# Altium PCB 矩形板V4.0.pcbdoc (part 1 of 2)
Units mm, origin at the board's own origin, x right, y up, seen from the top; angles counter-clockwise.
Board outline 153.79 x 190.97 mm, 2 copper layers (Top Layer, Bottom Layer); 164 components, 217 nets, 717 pads, 298 vias.
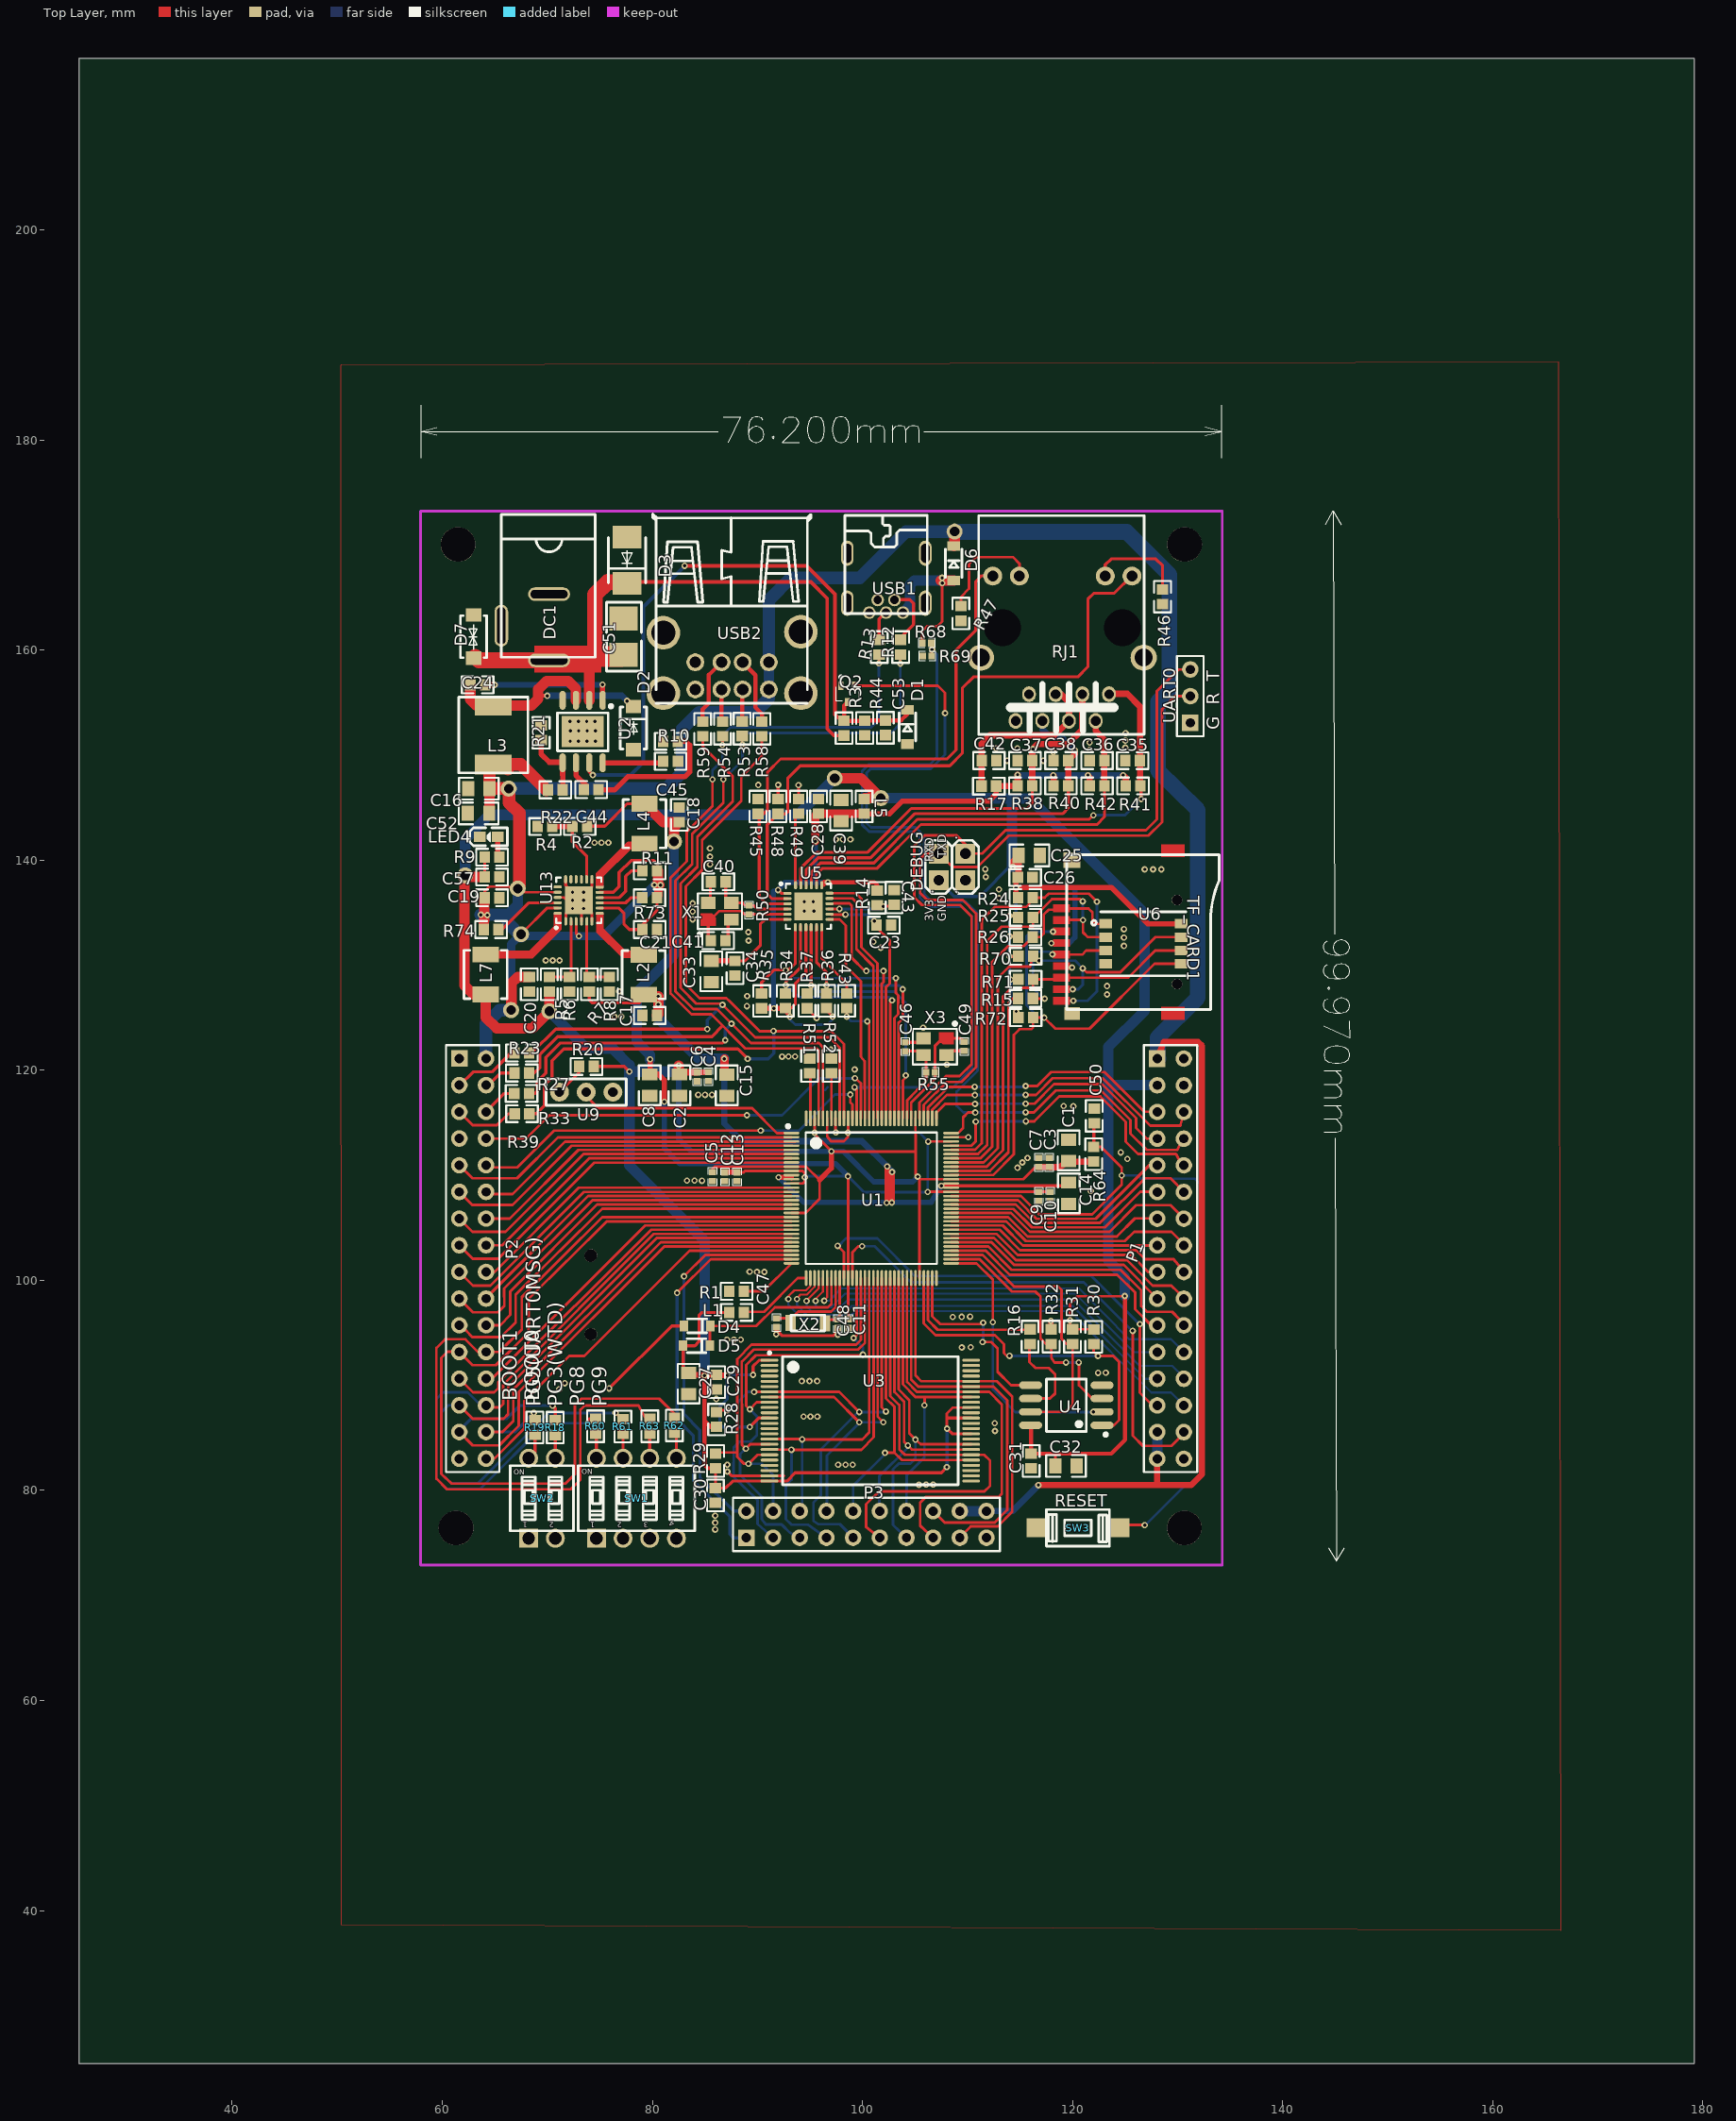
[diagram p0: Top Layer view]
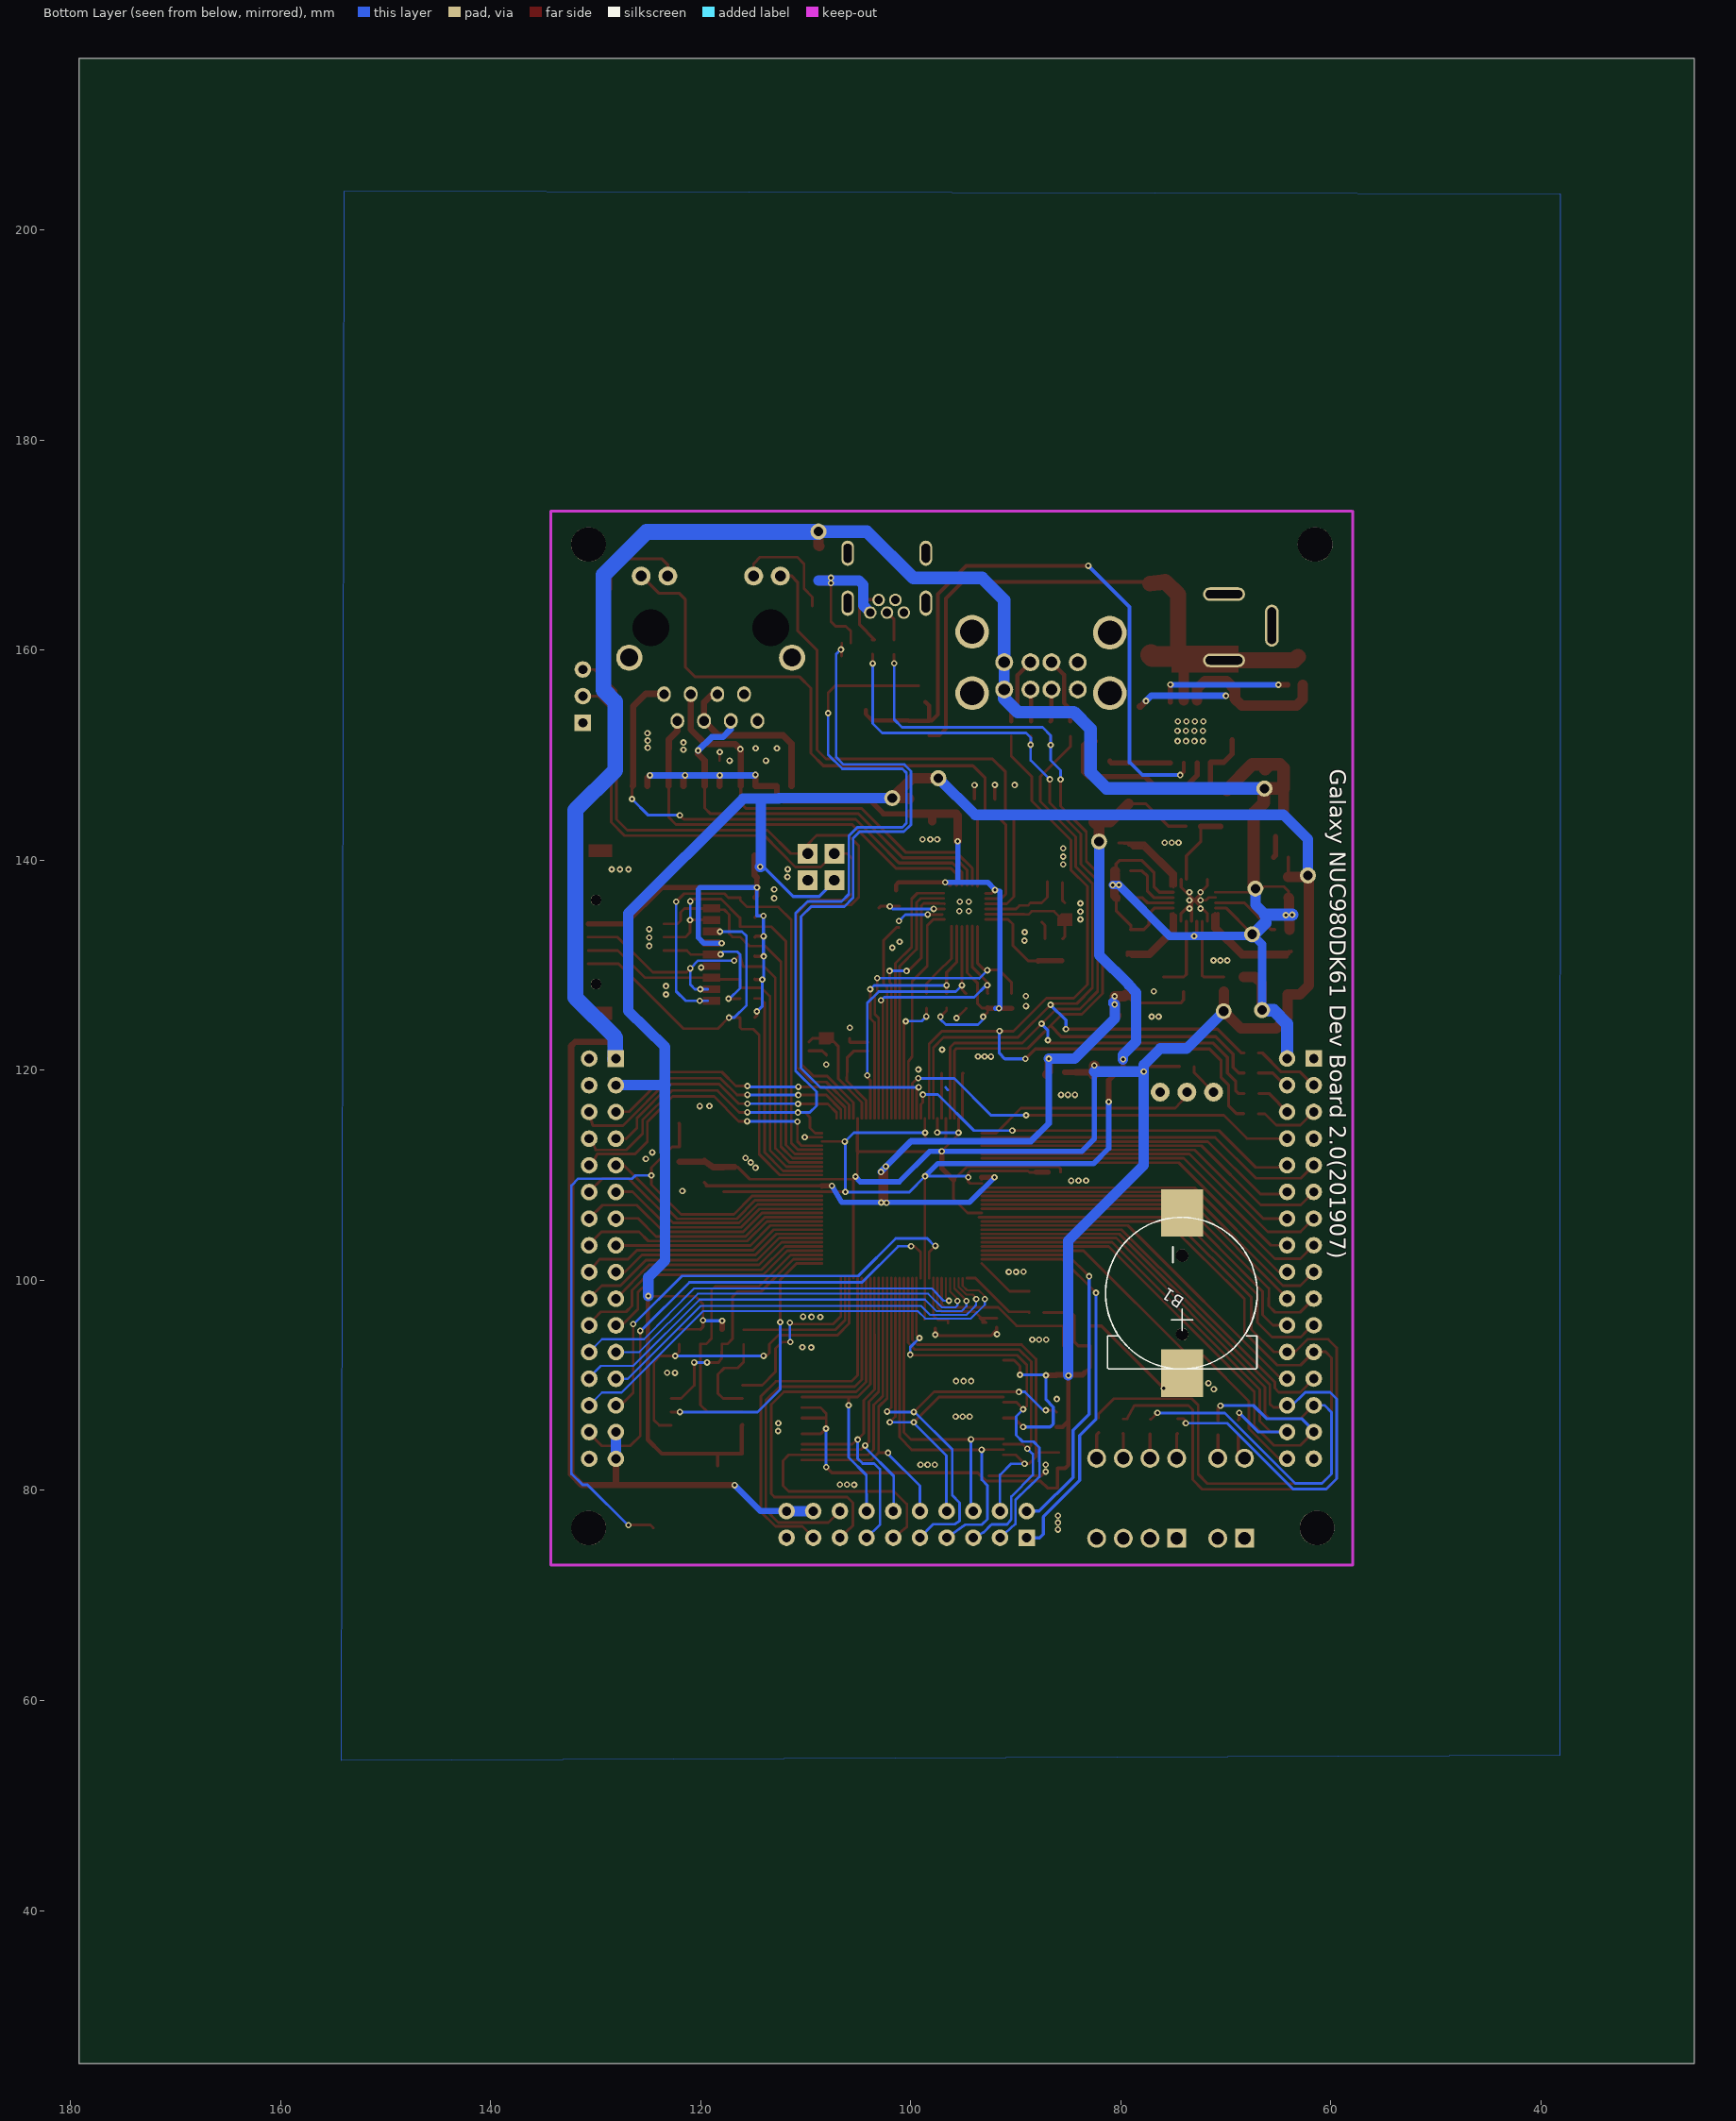
[diagram p1: Bottom Layer view, seen from below]

## Layer stack, top to bottom
Top Layer: signal copper (thickness not stored)
Dielectric: dielectric 0.32, FR-4, Dk 4.8
Bottom Layer: signal copper (thickness not stored)

## Board outline
179.187,25.4 25.4,25.4 25.4,216.368 179.187,216.368

## Components (designator, comment, footprint, x,y, rotation, side; value= is the part's Value field where it differs from the comment)
B1 "CR1220-2" BATTERY-2 74.141,98.779 r270 bottom
C1 "10uF" 0805 119.617,112.358 r270 top
C2 "10uF" 0805 82.583,118.59 r90 top
C3 "100nF" 0402 117.801,111.219 r270 top
C4 "100nF" 0402 85.341,119.399 r90 top
C5 "100nF" 0402 85.721,109.879 r90 top
C6 "100nF" 0402 84.261,119.379 r90 top
C7 "100nF" 0402 116.781,111.219 r270 top
C8 "10uF" 0805 79.751,118.589 r90 top
C9 "100nF" 0402 116.781,107.999 r90 top
C10 "100nF" 0402 117.861,107.999 r90 top
C11 "100nF" 0402 98.681,95.879 r90 top
C12 "100nF" 0402 86.901,109.859 r90 top
C13 "100nF" 0402 88.061,109.859 r90 top
C14 "10uF" 0805 119.641,108.299 r90 top
C15 "10uF" 0805 87.081,118.579 r90 top
C16 "22uF" 0805 63.477,146.819 r180 top
C17 "10uF" 0603 79.741,125.219 r0 top
C18 "22uF" 0603 82.563,144.317 r270 top
C19 "10uF" 0603 64.733,136.417 r180 top
C20 "10uF" 0603 68.286,128.179 r90 top
C21 "10uF" 0603 79.743,133.397 r180 top
C23 "15pF" 0603 102.041,133.819 r180 top
C24 "10nF" 0603 63.371,156.699 r0 top
C25 "10uF" 0805 115.875,140.459 r180 top
C26 "100nF" 0603 115.491,138.359 r180 top
C27 "10uF" 0805 83.444,90.173 r90 top
C28 "100nF" 0603 95.821,145.119 r270 top
C29 "100nF" 0603 86.111,90.3 r270 top
C30 "100nF" 0603 86.001,79.519 r90 top
C31 "100nF" 0603 116.061,82.799 r270 top
C32 "10uF" 0805 119.391,82.323 r0 top
C33 "10uF" 0805 85.617,129.408 r270 top
C34 "100nF" 0603 87.867,129.708 r270 top
C35 "10pF" 0603 125.722,149.475 r180 top
C36 "10pF" 0603 122.33,149.486 r180 top
C37 "10pF" 0603 115.472,149.486 r180 top
C38 "10pF" 0603 118.901,149.486 r180 top
C39 "10uF" 0805 97.961,144.719 r270 top
C40 "22pF" 0603 86.281,137.939 r180 top
C41 "22pF" 0603 86.261,132.339 r180 top
C42 "22nF" 0603 112.043,149.486 r0 top
C43 "100nF" 0603 103.018,136.446 r270 top
C44 "3.3nF" 0603 74.181,146.719 r180 top
C45 "100nF" 0603 81.741,149.419 r0 top
C46 "15pF" 0402 104.081,122.239 r270 top
C47 "15pF" 0402 91.801,95.959 r90 top
C48 "15pF" 0402 97.641,95.869 r90 top
C49 "15pF" 0402 109.681,122.279 r90 top
C50 "1uF" 0603 122.067,115.658 r270 top
C51 "22uF" 1210 77.271,161.269 r270 top
C52 "22uF" 0805 63.455,144.459 r180 top
C53 "10nF" 0603 102.181,152.609 r90 top
C57 "10uF" 0603 64.741,138.399 r180 top
D1 "BZT52C5V1" SOD-123 104.281,152.684 r270 top
D2 "B340A" SMA(DO-214AC) 78.201,152.579 r90 top
D3 "BEP0300SC" SMB(DO-214AA) 77.581,168.559 r270 top
D4 "1N4148WS T4" SOD-323 84.261,95.659 r0 top
D5 "1N4148WS T4" SOD-323 84.201,93.779 r0 top
D6 "DSK14" SOD-123 108.691,168.269 r270 top
D7 "SMAJ16CA_C152120" SMA(DO-214AC)-DOB 62.971,161.289 r270 top
DC1 "DC005-2.5MM" DC-5020 67.891,162.179 r270 top
DEBUG "4pin2x2" 4PINO 109.801,140.629 r270 top
L1 "0Ω" 0603 88.022,96.939 r0 top
L2 "1.5uH" L-SMD-4.1X4.6 79.173,129.087 r90 top
L3 "15uH" SMD-L-7.1X6.6 64.861,151.919 r0 top
L4 "1uH" L-SMD-4.1X4.6 79.253,143.477 r270 top
L5 "0Ω" 0603 100.161,145.119 r270 top
L7 "1.5uH" L-SMD-4.1X4.6 64.123,129.117 r90 top
LED4 "KT-0603R" LED-0603 64.42,142.229 r0 top
P1 "Header-Female-2.54_2x16" HDR-16X2/2.54 130.601,100.789 r270 top
P2 "Header-Female-2.54_2x16" HDR-16X2/2.54 64.161,100.799 r270 top
P3 "Header-Female-2.54_2x10" HDR-10X2/2.54 100.381,76.759 r0 top
Q2 "DTC143XUAT106" SOT-323_3PIN_L2.10-W2.20-PITCH0.65-TR 98.581,155.834 r90 top
R1 "0" 0603 88.021,98.959 r0 top
R2 "100K" 0603 73.081,143.219 r0 top
R3 "100K" 0603 98.241,152.569 r90 top
R4 "100K" 0603 69.781,143.209 r0 top
R5 "510K" 0603 70.193,128.187 r270 top
R6 "110K" 0603 72.098,128.187 r90 top
R7 "200K" 0603 74.001,128.179 r270 top
R8 "100K" 0603 75.906,128.179 r90 top
R9 "1K" 0603 64.741,140.289 r0 top
R10 "6.98K" 0603 81.731,151.309 r0 top
R11 "1K" 0603 79.753,138.987 r180 top
R12 "27" 0603 103.641,160.289 r270 top
R13 "27" 0603 101.591,160.289 r270 top
R14 "33" 0603 101.401,136.419 r90 top
R15 "0" 0603 115.531,126.839 r0 top
R16 "0" 0603 115.961,94.639 r90 top
R17 "0" 0603 112.031,147.049 r0 top
R18 "10K" 0603 70.751,85.979 r270 top
R19 "10K" 0603 68.821,85.989 r270 top
R20 "10K" 0603 73.721,120.359 r0 top
R21 "10K" 0603 69.411,152.139 r270 top
R22 "52.3K" 0603 70.761,146.699 r180 top
R23 "4.7" 0603 67.581,121.649 r180 top
R24 "10K" 0603 115.521,136.439 r180 top
R25 "10K" 0603 115.531,134.549 r180 top
R26 "10K" 0603 115.52,132.689 r180 top
R27 "4.7" 0603 67.571,119.739 r0 top
R28 "100K" 0603 86.111,86.744 r270 top
R29 "100K" 0603 86.017,82.808 r90 top
R30 "10K" 0603 122.021,94.619 r90 top
R31 "10K" 0603 120.001,94.639 r90 top
R32 "10K" 0603 117.961,94.639 r90 top
R33 "4.7" 0603 67.551,117.789 r0 top
R34 "4.7K" 0603 92.661,126.619 r90 top
R35 "4.7K" 0603 90.401,126.599 r90 top
R36 "4.7K" 0603 96.581,126.619 r90 top
R37 "4.7K" 0603 94.721,126.599 r90 top
R38 "49.9" 0603 115.472,147.073 r180 top
R39 "4.7" 0603 67.591,115.859 r180 top
R40 "49.9" 0603 118.901,147.073 r180 top
R41 "49.9" 0603 125.759,147.073 r180 top
R42 "49.9" 0603 122.33,147.073 r180 top
R43 "510" 0603 98.501,126.619 r90 top
R44 "47K" 0603 100.211,152.589 r90 top
R45 "10K" 0603 90.06,145.11 r270 top
R46 "470" 0603 128.571,165.089 r90 top
R47 "470" 0603 109.371,163.489 r90 top
R48 "10K" 0603 91.965,145.11 r270 top
R49 "12.1K" 0603 93.921,145.119 r270 top
R50 "1M" 0402 89.217,135.258 r90 top
R51 "12.1K" 0603 94.971,120.409 r270 top
R52 "12.1K" 0603 97.041,120.413 r270 top
R53 "4.7" 0603 88.551,152.519 r270 top
R54 "4.7" 0603 86.681,152.509 r270 top
R55 "1M" 0402 106.476,119.797 r180 top
R58 "4.7" 0603 90.421,152.509 r270 top
R59 "4.7" 0603 84.791,152.499 r270 top
R60 "10K" 0603 74.591,86.109 r270 top
R61 "10K" 0603 77.201,86.089 r270 top
R62 "10K" 0603 82.101,86.189 r270 top
R63 "10K" 0603 79.761,86.109 r270 top
R64 "100K" 0603 122.017,112.008 r270 top
R68 "20K" 0402 106.121,160.679 r180 top
R69 "39K" 0402 106.161,159.429 r0 top
R70 "10K" 0603 115.541,130.849 r180 top
R71 "10K" 0603 115.541,128.669 r180 top
R72 "10K" 0603 115.54,125.019 r180 top
R73 "1K" 0603 79.733,136.427 r180 top
R74 "1K" 0603 64.643,133.397 r180 top
RJ1 "HR911105A" RJ45-LIGHT 119.031,160.159 r180 top
SW1 "NDI-04H-V" NDI-04H-V 78.481,79.249 r0 top
SW2 "NDI-02H-V" NDI-02H-V 69.491,79.249 r0 top
SW3 "RESET" KEY-TOUCH-SMD-6.0*3.5*H-(A) 120.511,76.429 r0 top
TF_CARD1 "TF_CARD" TF-115_MRS 118.951,126.609 r0 top
U1 "NUC980DK61Y" LQFP-128_14X14X04P 100.841,107.819 r0 top
U2 "MP2303ADN-LF-Z" SOIC-8_EP_150MIL 73.361,152.249 r270 top
U3 "MT29F2G08ABAEAWP-IT:E" TSOP-48 100.751,86.639 r90 top
U4 "W25Q128JVSIQTR" SOIC-8_208MIL 119.411,88.109 r180 top
U5 "LAN8720AI" QFN-24_4X4X05P 94.861,135.619 r0 top
U6 "MKDV4GIL-AS" LGA-8_8PIN-L6.10-W8.10-PITCH0.65-TL 126.741,132.039 r0 top
U9 "3pin插针" 3PIN插针 76.241,117.919 r180 top
U13 "EA3059C" QFN-24_4X4X05P 72.986,136.181 r90 top
UART0 "2.54排针 3pin" HDR-3X1/2.54 131.211,155.619 r90 top
USB1 "Mini USB-B 5P-Female-TH_C46398" USB-MINI-2 102.271,166.399 r180 top
USB2 "Double layer DIP 90° black" USB-M-51 87.59,158.823 r180 top
X1 "25MHz" OSC-YSX-3225_4P 86.421,135.139 r0 top
X2 "32.768KHz" SMD-3215_2P 94.801,95.939 r0 top
X3 "12MHz" OSC-YSX-3225_4P 106.901,122.239 r180 top
? "" ? 96.061,180.791 r0 top
? "" ? 145.141,123.249 r0 top

## Footprints (in the part's own frame and the unit in brackets; to place one, negate y for a bottom-side part, rotate by r counter-clockwise, add the part's x,y. Pads: shape width x height; smd on the part's side, far side on the other; paste and mask are expansions set on the pad)
3PIN插针 [mm]
  round 1.8 hole 0.9: 1(0,0) 2(2.54,0) 3(5.08,0)
  silkscreen extent -1.27,-1.27 6.35,1.27
4PINO [mil]
  rect 74x74 hole 40: a(0,0) b(100,0) c(0,-100) d(100,-100)
  silkscreen extent -50,-150 150,50
0402 [mm]
  rect 0.6x0.65 smd: 1(-0.424,0) 2(0.424,0)
  silkscreen extent -0.82,-0.43 0.81,0.43
0603 [mm]
  rect 1x1.1 smd: 1(-0.7,0) 2(0.7,0)
  silkscreen extent -1.5,-0.8 1.5,0.8
0805 [mm]
  rect 1.16x1.45 smd: 1(-1.016,0) 2(1.016,0)
  silkscreen extent -1.9,-1.03 1.87,1.04
1210 [mil]
  rect 90.56x106.3 smd: 1(-68,0) 2(68,0)
  silkscreen extent -130,-65 129,66
BATTERY-2 [mm]
  round 1.2 hole 1.2: 0(-3.581,0) 0(3.912,0)
  rect 4.5x4 smd: 1(7.62,0) 2(-7.62,0)
  silkscreen extent -7.22,-7.3 7.22,7.14
DC-5020 [mm]
  oval 1.3x3.999 hole 0.8 slot 3.5 at 90 deg: 1(3.15,2.275) 2(-3.15,2.275)
  oval 3.999x1.3 hole 0.8 slot 3.5 at 0 deg: 3(-0.15,-2.275)
  silkscreen extent -10.75,-2.28 2.85,6.67
HDR-3X1/2.54 [mil]
  rect 62x62 hole 35: 1(-100,0)
  round 62 hole 35: 2(0,0) 3(100,0)
  silkscreen extent -150,-50 150,50
HDR-10X2/2.54 [mil]
  rect 62x62 hole 35: 1(-450,-50)
  round 62 hole 35: 2(-450,50) 3(-350,-50) 4(-350,50) 5(-250,-50) 6(-250,50) 7(-150,-50) 8(-150,50) 9(-50,-50) 10(-50,50) 11(50,-50) 12(50,50) 13(150,-50) 14(150,50) 15(250,-50) 16(250,50) 17(350,-50) 18(350,50) 19(450,-50) 20(450,50)
  silkscreen extent -500,-100 500,100
HDR-16X2/2.54 [mil]
  rect 62x62 hole 35: 1(-800,-100)
  round 62 hole 35: 2(-800,0) 3(-700,-100) 4(-700,0) 5(-600,-100) 6(-600,0) 7(-500,-100) 8(-500,0) 9(-400,-100) 10(-400,0) 11(-300,-100) 12(-300,0) 13(-200,-100) 14(-200,0) 15(-100,-100) 16(-100,0) 17(0,-100) 18(0,0) 19(100,-100) 20(100,0) 21(200,-100) 22(200,0) 23(300,-100) 24(300,0) 25(400,-100) 26(400,0) 27(500,-100) 28(500,0) 29(600,-100) 30(600,0) 31(700,-100) 32(700,0)
  silkscreen extent -850,-150 750,50
KEY-TOUCH-SMD-6.0*3.5*H-(A) [mm]
  rect 1.8x1.8 smd: 1(-4,0) 2(4,0)
  silkscreen extent -3,-1.75 3,1.75
L-SMD-4.1X4.6 [mm]
  rect 1.5x2.5 smd: 1(-1.9,0) 2(1.9,0)
  silkscreen extent -2.3,-2.05 2.3,2.05
LED-0603 [mil]
  rect 43x39 smd: 1(33.5,0) 2(-33.5,0)
  silkscreen extent -72,-34 70,34
LGA-8_8PIN-L6.10-W8.10-PITCH0.65-TL [mm]
  rect 1.2x0.9 smd: 1(-3.6,1.905) 2(-3.6,0.635) 3(-3.6,-0.635) 4(-3.6,-1.905) 5(3.6,-1.905) 6(3.6,-0.635) 7(3.6,0.635) 8(3.6,1.905)
  silkscreen extent -4.92,-3.05 4.05,3.05
LQFP-128_14X14X04P [mm]
  oval 1.5x0.25 smd: 1(-7.6,6.2) 2(-7.6,5.799) 3(-7.6,5.4) 4(-7.6,5.001) 5(-7.6,4.6) 6(-7.6,4.201) 7(-7.6,3.8) 8(-7.6,3.401) 9(-7.6,3) 10(-7.6,2.601) 11(-7.6,2.2) 12(-7.6,1.801) 13(-7.6,1.4) 14(-7.6,1.001) 15(-7.6,0.599) 16(-7.6,0.201) 17(-7.6,-0.201) 18(-7.6,-0.599) 19(-7.6,-1.001) 20(-7.6,-1.4) 21(-7.6,-1.801) 22(-7.6,-2.2) 23(-7.6,-2.601) 24(-7.6,-3) 25(-7.6,-3.401) 26(-7.6,-3.8) 27(-7.6,-4.201) 28(-7.6,-4.6) 29(-7.6,-5.001) 30(-7.6,-5.4) 31(-7.6,-5.799) 32(-7.6,-6.2) 65(7.6,-6.2) 66(7.6,-5.799) 67(7.6,-5.4) 68(7.6,-5.001) 69(7.6,-4.6) 70(7.6,-4.201) 71(7.6,-3.8) 72(7.6,-3.401) 73(7.6,-3) 74(7.6,-2.601) 75(7.6,-2.2) 76(7.6,-1.801) 77(7.6,-1.4) 78(7.6,-1.001) 79(7.6,-0.599) 80(7.6,-0.201) 81(7.6,0.201) 82(7.6,0.599) 83(7.6,1.001) 84(7.6,1.4) 85(7.6,1.801) 86(7.6,2.2) 87(7.6,2.601) 88(7.6,3) 89(7.6,3.401) 90(7.6,3.8) 91(7.6,4.201) 92(7.6,4.6) 93(7.6,5.001) 94(7.6,5.4) 95(7.6,5.799) 96(7.6,6.2)
  oval 0.25x1.5 smd: 33(-6.2,-7.6) 34(-5.799,-7.6) 35(-5.4,-7.6) 36(-5.001,-7.6) 37(-4.6,-7.6) 38(-4.201,-7.6) 39(-3.8,-7.6) 40(-3.401,-7.6) 41(-3,-7.6) 42(-2.601,-7.6) 43(-2.2,-7.6) 44(-1.801,-7.6) 45(-1.4,-7.6) 46(-1.001,-7.6) 47(-0.599,-7.6) 48(-0.201,-7.6) 49(0.201,-7.6) 50(0.599,-7.6) 51(1.001,-7.6) 52(1.4,-7.6) 53(1.801,-7.6) 54(2.2,-7.6) 55(2.601,-7.6) 56(3,-7.6) 57(3.401,-7.6) 58(3.8,-7.6) 59(4.201,-7.6) 60(4.6,-7.6) 61(5.001,-7.6) 62(5.4,-7.6) 63(5.799,-7.6) 64(6.2,-7.6) 97(6.2,7.6) 98(5.799,7.6) 99(5.4,7.6) 100(5.001,7.6) 101(4.6,7.6) 102(4.201,7.6) 103(3.8,7.6) 104(3.401,7.6) 105(3,7.6) 106(2.601,7.6) 107(2.2,7.6) 108(1.801,7.6) 109(1.4,7.6) 110(1.001,7.6) 111(0.599,7.6) 112(0.201,7.6) 113(-0.201,7.6) 114(-0.599,7.6) 115(-1.001,7.6) 116(-1.4,7.6) 117(-1.801,7.6) 118(-2.2,7.6) 119(-2.601,7.6) 120(-3,7.6) 121(-3.401,7.6) 122(-3.8,7.6) 123(-4.201,7.6) 124(-4.6,7.6) 125(-5.001,7.6) 126(-5.4,7.6) 127(-5.799,7.6) 128(-6.2,7.6)
  silkscreen extent -8.07,-6.25 6.25,7
NDI-02H-V [mm]
  rect 1.8x1.8 hole 1.2: 1(-1.27,-3.81)
  round 1.8 hole 1.2: 2(1.27,-3.81) 3(1.27,3.81) 4(-1.27,3.81)
  silkscreen extent -3.01,-3.1 3.01,3.1
NDI-04H-V [mm]
  rect 1.8x1.8 hole 1.2: 1(-3.81,-3.81)
  round 1.8 hole 1.2: 2(-1.27,-3.81) 3(1.27,-3.81) 4(3.81,-3.81) 5(3.81,3.81) 6(1.27,3.81) 7(-1.27,3.81) 8(-3.81,3.81)
  silkscreen extent -5.55,-3.1 5.55,3.1
OSC-YSX-3225_4P [mm]
  round 0 smd: 1(-1.1,-0.8)
  rect 1.4x1.15 smd: 2(1.1,-0.8) 3(1.1,0.8) 4(-1.1,0.8)
  Top Layer region: -1.8,-0.225 -0.762,-0.225 -0.4,-0.604 -0.4,-1.375 -1.8,-1.375
  silkscreen extent -2.1,-2.35 2.1,1.7
QFN-24_4X4X05P [mm]
  oval 0.796x0.28 smd: 1(-2,1.232) 2(-2,0.732) 3(-2,0.231) 4(-2,-0.267) 5(-2,-0.767) 6(-2,-1.267) 13(2,-1.257) 14(2,-0.757) 15(2,-0.257) 16(2,0.241) 17(2,0.742) 18(2,1.242)
  oval 0.28x0.796 smd: 7(-1.245,-2) 8(-0.744,-2) 9(-0.244,-2) 10(0.254,-2) 11(0.754,-2) 12(1.255,-2) 19(1.27,2) 20(0.77,2) 21(0.269,2) 22(-0.229,2) 23(-0.729,2) 24(-1.229,2)
  rect 2.68x2.68 smd: 25(0,-0.013)
  silkscreen extent -2.84,-2.16 2.15,2.35
RJ45-LIGHT [mm]
  oval 1.3x1.499 hole 0.914 copper offset 0,0: 1(-4.445,4.355) 2(-3.175,6.895) 3(-1.905,4.355) 4(-0.635,6.895) 5(0.635,4.355) 6(1.905,6.895) 7(3.175,4.355) 8(4.445,6.895)
  round 1.8 hole 1.04: 9(-6.625,-6.895) 10(-4.085,-6.895) 11(4.085,-6.895) 12(6.625,-6.895)
  round 2.5 hole 1.702: 13(-7.75,0.875) 14(7.75,0.875)
  round 2 hole 3.5 unplated: 15(5.715,-1.995) 16(-5.715,-1.995)
  silkscreen extent -7.78,-12.65 7.96,8.18
SMA(DO-214AC) [mil]
  rect 50x57.9 smd: 1(-81,0) 2(81,0)
  silkscreen extent -78,-49 79,49
SMA(DO-214AC)-DOB [mil]
  rect 50x57.9 smd: 1(-81,0) 2(81,0)
  silkscreen extent -78,-49 79,49
SMB(DO-214AA) [mil]
  rect 85x108 smd: 1(-87,0) 2(87,0)
  silkscreen extent -85,-70 85,70
SMD-3215_2P [mm]
  rect 1x1.524 smd: 1(-1.648,0.024) 2(1.648,-0.024)
  silkscreen extent -1.6,-0.75 1.6,0.75
SMD-L-7.1X6.6 [mm]
  rect 3.5x1.9 smd: 1(0,2.8) 2(0,-2.8)
  silkscreen extent -3.3,-3.6 3.3,3.6
SOD-123 [mil]
  rect 35.8x48 smd: 1(64,0) 2(-64,0)
  silkscreen extent -53,-31 53,31
SOD-323 [mm]
  rect 0.8x1 smd: 1(-1.27,0) 2(1.27,0)
  silkscreen extent -0.89,-0.66 0.89,0.66
SOIC-8_208MIL [mm]
  oval 2.2x0.7 smd: 1(-3.4,1.905) 2(-3.4,0.635) 3(-3.4,-0.635) 4(-3.4,-1.905) 5(3.4,-1.905) 6(3.4,-0.635) 7(3.4,0.635) 8(3.4,1.905)
  silkscreen extent -3.9,-2.5 1.9,2.95
SOIC-8_EP_150MIL [mm]
  oval 1.798x0.6 smd: 1(-2.972,1.905) 2(-2.972,0.635) 3(-2.972,-0.635) 4(-2.972,-1.905) 5(2.972,-1.905) 6(2.972,-0.635) 7(2.972,0.635) 8(2.972,1.905)
  rect 3x4 smd: 9(0,0)
  silkscreen extent -2.56,-2.39 1.83,2.84
SOT-323_3PIN_L2.10-W2.20-PITCH0.65-TR [mm]
  rect 0.8x0.5 smd: 1(0.775,0.65) 2(0.775,-0.65) 3(-0.775,0)
  silkscreen extent -0.68,-1.1 1.83,1.1
TF-115_MRS [mm]
  round 0 smd: 1(0,8.8) 2(0,7.7) 3(0,6.6) 4(0,5.5) 5(0,4.4) 6(0,3.3) 7(0,2.2) 8(0,1.1) 9(0,0) 11(10.6,-1.2) 12(10.6,14.3)
  rect 1.5x1.2 smd: 10(1,-1.2)
  rect 1.6x1.5 smd: 13(1,13.4)
  round 1 hole 1 unplated: ""(11,1.6) ""(11,9.6)
  Top Layer region: -0.8,-0.351 -0.8,0.351 0.8,0.351 0.8,-0.351
  Top Layer region: -0.8,0.749 -0.8,1.45 0.8,1.45 0.8,0.749
  Top Layer region: -0.8,1.849 -0.8,2.55 0.8,2.55 0.8,1.849
  Top Layer region: -0.8,2.949 -0.8,3.65 0.8,3.65 0.8,2.949
  Top Layer region: -0.8,4.049 -0.8,4.75 0.8,4.75 0.8,4.049
  Top Layer region: -0.8,5.151 -0.8,5.85 0.8,5.85 0.8,5.151
  Top Layer region: -0.8,6.251 -0.8,6.949 0.8,6.949 0.8,6.251
  Top Layer region: -0.8,7.351 -0.8,8.049 0.8,8.049 0.8,7.351
  Top Layer region: -0.8,8.451 -0.8,9.149 0.8,9.149 0.8,8.451
  Top Layer region: 9.499,13.701 9.499,14.9 11.699,14.9 11.699,13.701
  Top Layer region: 9.499,-1.801 9.499,-0.6 11.699,-0.6 11.699,-1.801
  silkscreen extent 0.5,-0.82 15,13.92
TSOP-48 [mm]
  oval 0.28x1.696 smd: 1(5.75,9.6) 2(5.25,9.6) 3(4.75,9.6) 4(4.25,9.6) 5(3.75,9.6) 6(3.25,9.6) 7(2.75,9.6) 8(2.25,9.6) 9(1.75,9.6) 10(1.25,9.6) 11(0.75,9.6) 12(0.25,9.6) 13(-0.25,9.6) 14(-0.75,9.6) 15(-1.25,9.6) 16(-1.75,9.6) 17(-2.25,9.6) 18(-2.75,9.6) 19(-3.25,9.6) 20(-3.75,9.6) 21(-4.25,9.6) 22(-4.75,9.6) 23(-5.25,9.6) 24(-5.75,9.6) 25(-5.75,-9.6) 26(-5.25,-9.6) 27(-4.75,-9.6) 28(-4.25,-9.6) 29(-3.75,-9.6) 30(-3.25,-9.6) 31(-2.75,-9.6) 32(-2.25,-9.6) 33(-1.75,-9.6) 34(-1.25,-9.6) 35(-0.75,-9.6) 36(-0.25,-9.6) 37(0.25,-9.6) 38(0.75,-9.6) 39(1.25,-9.6) 40(1.75,-9.6) 41(2.25,-9.6) 42(2.75,-9.6) 43(3.25,-9.6) 44(3.75,-9.6) 45(4.25,-9.6) 46(4.75,-9.6) 47(5.25,-9.6) 48(5.75,-9.6)
  silkscreen extent -6.1,-8.35 6.58,9.72
USB-M-51 [mm]
  round 3.2 hole 2.3: 0(-6.551,-2.925) 0(-6.551,2.925) 0(6.551,-2.826) 0(6.551,2.925)
  round 1.7 hole 1.1: 1(-3.5,2.574) 2(-1.001,2.574) 3(1.001,2.574) 4(3.5,2.574) 5(-3.5,-0.027) 6(-1.001,-0.027) 7(1.001,-0.027) 8(3.5,-0.027)
  silkscreen extent -7.52,-14.13 7.54,3.87
USB-MINI-2 [mm]
  oval 1.2x2.4 hole 0.8 slot 1.8 at 90 deg copper offset 0,0: 0(-3.72,-2.826) 0(-3.72,1.924) 0(3.72,-2.826) 0(3.72,1.924)
  round 1.2 hole 0.8: 1(-1.58,2.826) 2(-0.78,1.622) 3(0.02,2.826) 4(0.82,1.622) 5(1.62,2.826)
  silkscreen extent -3.89,-6.42 3.96,2.93
? [mm]
  silkscreen extent -38.1,-2.51 38.1,2.51

## Free pads (board coordinates)
  round 1.524 hole 0.914: 1(66.551,125.729) 1(67.493,132.947) 2(82.06,141.778) 2(101.751,145.909) 4(70.193,125.619) 5(108.771,171.289) 6(66.321,146.819) 7(62.181,138.549) 8(67.181,137.299) 9(97.361,147.809)
  round 3.302 hole 3.302 unplated: ""(61.311,76.419) ""(61.501,170.059) ""(130.651,76.419) ""(130.671,170.059)

## Via types
v1: diameter 0.61, hole 0.305, Top Layer to Bottom Layer, 298 vias

## Nets (pads, with @x,y where several pads share a name; then routed paths per layer and width w, separated by ;. In a path a pad name is that pad's centre, name@x,y a point inside that pad or via, vN(x,y) a via of type N, cw(c..) or ccw(c..) an arc to the next point about the centre after c; other vN are vias at no path point)
1.2V: C8.2 C9.2 C10.2 C11.2 C12.2 C13.2 C18.2 L4.1 pad.2@82.06,141.778 R2.2 U1.10 U1.13 U1.43 U1.82 U1.94 U1.118 U1.123 | length 131.8
  Top Layer w0.25: U1.43@98.643,100.226 98.643,96.341 C11.2@98.681,96.303
  Top Layer w0.254: C13.2@88.061,110.283 88.684,110.283 88.821,110.42 91.801,110.42 U1.10@93.241,110.42
  Top Layer w0.26: U1.13@93.243,109.225 94.335,109.225 94.516,109.408 v1(94.516,109.808) 94.516,110.172 94.318,110.406 U1.10@93.243,110.426 ; U1.123@96.642,115.425 96.642,113.675 97.001,113.238 98.235,113.238 98.621,113.639 v1@98.616,114.058 ; v1@98.617,109.908 98.643,109.881 U1.43@98.643,100.226 ; v1(98.617,114.058) 98.643,114.084 U1.118@98.643,115.425 ; v1(106.217,108.408) 106.234,108.425 106.499,108.425 108.442,108.425 116.779,108.425 C9.2@116.781,108.423 ; v1(106.267,113.208) 106.285,113.226 U1.94@108.442,113.226 ; C9.2@116.66,108.44 C10.2@117.811,108.44
  Top Layer w0.28: R2.2@73.78,143.238 75.464,143.238 77.603,145.376 L4.1@79.253,145.377
  Top Layer w0.5: C8.2@79.751,119.605 C8.2@79.781,119.635 ; v1(79.781,121.039) C8.2@79.781,119.635 ; v1(81.141,116.989) 81.141,119.049 80.555,119.635 C8.2@79.781,119.635 ; C12.2@86.901,110.303 86.921,110.283 C13.2@88.061,110.283
  Top Layer w1: L4.1@79.253,145.377 81.013,143.617 C18.2@82.563,143.617 82.061,143.115 pad.2@82.06,141.778
  Bottom Layer w0.26: v1(94.516,109.808) 94.616,109.908 v1@98.617,109.908 ; v1@98.616,109.908 100.112,108.407 v1@106.216,108.407 ; v1(98.617,114.058) 105.417,114.059 v1(106.267,113.208) ; v1(106.217,108.408) 106.217,113.158 v1(106.267,113.208)
  Bottom Layer w0.5: v1(81.141,116.989) 81.141,112.559 82.601,111.099 96.902,111.119 97.404,111.119 v1@98.616,109.908
  Bottom Layer w1: v1(79.781,121.039) 79.781,121.469 78.521,122.729 78.521,127.398 79.23,128.107 79.23,128.16 82.03,130.959 82.03,141.749 pad.2@82.06,141.78
  other v1: 98.617,109.908
1.8V: C14.2 C15.2 C17.2 L2.1 R7.2 U1.11 U1.12 U1.83 U1.84 | length 88.5
  Top Layer w0.26: U1.12@93.241,109.62 93.243,109.622 U1.12@93.243,109.626 ; U1.83@108.44,108.82 108.44,108.824 U1.83@108.443,108.826
  Top Layer w0.3: R7.2@74.009,127.48 74.009,126.695 74.296,126.408 78.705,126.408 79.172,126.878 L2.1@79.173,127.187 ; v1(107.501,108.999) 119.458,108.999 119.458,109.132 C14.2@119.641,109.315
  Top Layer w0.5: v1(92.017,109.808) 93.026,109.808 93.243,109.819 ; v1(102.301,107.379) 102.361,107.439 v1(102.361,110.839) ; v1(102.801,107.399) 102.821,107.419 v1(102.821,110.319) ; v1(107.501,108.999) 108.439,108.999 108.443,108.995
  Top Layer w0.8: v1(86.851,121.099) 86.851,119.825 C15.2@87.081,119.595
  Top Layer w1: L2.1@79.173,127.187 79.502,127.187 79.651,127.039 v1(80.571,127.039) v1(80.571,126.269) 80.571,125.349 C17.2@80.441,125.219
  Bottom Layer w0.3: v1(80.571,126.269) v1(80.571,127.039) ; v1(80.571,126.269) v1(80.571,127.039) ; v1(80.571,126.269) v1(80.571,127.039) ; v1(80.571,126.269) v1(80.571,127.039) 81.052,126.558 81.052,126.268 v1(80.571,126.269) ; v1(80.571,126.269) v1(80.571,127.039)
  Bottom Layer w0.5: v1@92.017,109.799 94.417,107.409 106.561,107.439 v1(107.501,108.999)
  Bottom Layer w0.6: v1(86.851,121.099) 86.851,114.927 88.54,113.238 99.96,113.238 102.36,110.838 102.393,110.787 102.86,110.319 v1@102.82,110.319
  Bottom Layer w1: v1(80.571,126.269) 80.572,124.919 84.389,121.099 v1(86.851,121.099)
3.3V: C1.2 C2.2 C3.2 C4.2 C5.2 C6.2 C7.2 C25.2 C26.2 C27.2 C29.1 C30.2 C31.1 C32.1 C57.2 D5.1 DEBUG.d L1.1 L5.1 L7.1 P1.3 pad.2@101.751,145.909 pad.4 pad.7 pad.9 R5.2 R9.1 R20.2 R24.2 R25.2 R26.2 R28.2 R29.1 R30.2 R31.2 R32.2 R64.2 R70.2 R71.2 R72.2 TF_CARD1.4 U1.9 U1.20 U1.60 U1.85 U1.102 U1.121 U1.126 U3.1 U3.12 U3.24 U3.34 U3.37 U3.39 U4.8 U6.8 | length 492.8
  Top Layer w0.25: C5.2@85.721,110.303 85.721,110.619 85.921,110.818 U1.9@93.241,110.819 ; v1(108.061,85.879) 108.031,85.909 108.031,87.309 108.611,87.889 U3.39@110.351,87.889 ; v1(119.761,96.189) 119.762,97.739 120.506,98.486 v1(124.971,98.509) ; R31.2@120.001,95.339 122.001,95.339 R30.2@122.021,95.319
  Top Layer w0.254: C2.2@82.363,119.575 C2.2@82.652,119.575 ; U1.85@108.443,109.626 115.309,109.626 116.477,110.794 C7.2@116.78,110.794
  Top Layer w0.26: U1.20@93.244,106.426 94.585,106.426 95.921,107.762 95.921,109.56 94.649,110.825 U1.9@93.244,110.825 ; U1.126@95.444,115.425 v1(95.444,114.059) 95.444,113.908 97.087,112.26 105.083,112.26 U1.102@105.045,115.425 ; U1.121@97.44,115.42 97.44,114.089 v1(97.461,114.069) ; 105.064,113.855 105.067,110.058 v1(105.254,109.872) 105.499,109.626 U1.85@108.443,109.626 ; U1.60@105.443,100.226 105.443,109.571 105.498,109.626
  Top Layer w0.28: v1(89.281,86.029) 90.13,86.888 U3.12@91.151,86.889 ; v1(89.591,90.999) 89.591,91.819 90.161,92.389 U3.1@91.151,92.389
  Top Layer w0.3: C57.2@64.041,138.399 R9.1@64.041,140.289 ; R20.2@74.421,120.359 77.321,120.359 v1(77.811,119.869) ; C27.2@83.444,91.189 82.931,91.702 D5.1@82.931,93.779 83.901,93.779 84.041,93.779 84.441,94.179 84.441,96.639 84.741,96.939 L1.1@87.321,96.939 ; R29.1@86.017,82.108 86.017,80.235 C30.2@86.001,80.219 86.963,80.219 87.633,80.889 U3.24@91.151,80.889 92.802,80.888 93.6,81.689 107.501,81.689 v1(108.031,82.219) ; v1(108.061,85.879) 108.551,85.389 U3.34@110.351,85.389 ; 108.061,86.889 108.92,86.889 U3.37@110.351,86.889 ; v1(113.991,130.849) 114.821,130.849 R70.2@114.841,130.869 ; v1(114.001,132.759) 114.751,132.759 R26.2@114.82,132.689 ; v1(114.011,134.699) 114.681,134.699 R25.2@114.831,134.549 ; v1(114.121,128.629) 114.801,128.629 R71.2@114.841,128.669 ; v1(114.641,125.599) 114.641,125.219 R72.2@114.84,125.019 ; C32.1@118.375,82.323 118.375,83.5 ; v1(119.761,96.189) 119.761,95.579 R31.2@120.001,95.339
  Top Layer w0.4: v1@85.036,91 v1(84.968,90.931) 84.968,86.617 ; R29.1@85.984,82.107 85.287,82.107 84.968,82.426 84.968,86.617 ; R28.2@86.111,86.044 85.541,86.044 84.968,86.617 ; U4.8@116.011,86.204 116.061,86.154 C31.1@116.061,83.499 ; C31.1@116.061,83.499 123.691,83.5 125.012,84.818 125.012,98.508 v1(124.971,98.509)
  Top Layer w0.5: C27.2@83.444,91.189 83.633,91 C29.1@86.111,91 86.153,90.958 v1(87.117,90.958) ; C6.2@84.261,119.803 85.321,119.803 C4.2@85.341,119.823 ; 95.921,109.56 97.041,110.68 v1(97.041,112.278) ; v1(114.321,139.379) 114.321,139.921 C25.2@114.859,140.459 ; C26.2@114.631,138.339 v1(114.631,137.399) ; R24.2@114.821,136.439 114.631,136.629 v1(114.631,137.399) ; v1(117.941,96.139) 117.941,95.359 R32.2@117.961,95.339 ; v1(117.991,132.099) 119.301,132.099 119.321,132.119 ; U6.8@130.691,133.944 127.156,133.944 123.701,137.399 v1(114.631,137.399)
  Top Layer w0.6: C2.2@82.583,119.606 82.78,119.803 C6.2@84.261,119.803 ; C26.2@114.631,138.339 114.859,138.567 C25.2@114.859,140.459 ; C7.2@116.781,110.795 C3.2@117.801,110.795 ; C3.2@117.801,110.779 118.781,110.779 C1.2@119.617,111.342 ; C1.2@119.617,111.358 119.617,111.3 R64.2@122.017,111.3
  Top Layer w1: C57.2@64.041,138.399 62.331,138.399 pad.7@62.181,138.549 62.181,138.293 62.101,138.214 62.101,128.059 62.942,127.218 L7.1@64.123,127.217 64.123,125.036 65.19,123.969 68.57,123.969 pad.4@70.193,125.59 ; R5.2@70.193,127.487 pad.4@70.193,125.619 pad.4@70.193,125.59 ; pad.4@70.2,125.59 pad.4@70.193,125.59 ; v1(82.511,120.449) 82.511,119.678 C2.2@82.583,119.606 ; pad.9@97.361,147.809 99.851,147.809 pad.2@101.751,145.909 100.201,145.909 100.161,145.869 L5.1@100.161,145.819
  Bottom Layer w0.26: v1(95.444,114.059) 95.454,114.069 v1(97.461,114.069)
  Bottom Layer w0.28: v1(87.117,90.958) 87.117,90.999 v1(89.591,90.999)
  Bottom Layer w0.3: v1(87.117,90.958) 87.117,88.666 86.412,87.93 86.42,86.322 86.713,86.029 v1(89.281,86.029) ; DEBUG.d@107.261,138.089 107.262,137.998 108.72,136.54 111.18,136.54 114.271,139.629 114.271,139.428 v1(114.321,139.379) ; v1(108.031,82.219) 108.061,82.219 v1(108.061,85.879) ; v1(114.631,137.399) 114.631,134.699 v1(114.011,134.699) 114.011,132.769 v1(114.001,132.759) 114.001,130.859 v1(113.991,130.849) 113.991,128.759 v1(114.121,128.629) 114.121,126.119 v1(114.641,125.599) ; v1(117.941,96.139) 119.761,96.139 v1(119.761,96.189)
  Bottom Layer w0.4: v1@84.931,90.967 v1(84.968,90.931)
  Bottom Layer w0.5: 82.511,119.869 v1(82.511,120.449) 82.511,113.489 83.721,112.278 v1(97.041,112.278) 98.182,112.278 101.08,109.38 104.793,109.38 v1@105.256,109.867 ; v1(114.631,137.399) 120.03,137.399 120.221,137.209 120.221,132.639 119.681,132.099 v1(117.991,132.099)
  Bottom Layer w1: pad.7@62.181,138.549 62.181,141.999 64.501,144.32 93.872,144.32 pad.9@97.361,147.809 ; pad.4@70.193,125.619 73.742,122.069 76.241,122.069 77.811,120.5 v1(77.811,119.869) ; 82.511,119.869 v1(77.811,119.869) ; v1@84.991,90.967 84.991,103.759 77.811,110.939 v1(77.811,119.869) ; pad.2@101.751,145.909 112.521,145.909 112.54,145.89 ; v1(114.321,139.379) 114.25,139.379 114.25,145.879 112.54,145.879 115.941,145.879 126.871,134.95 126.871,125.664 123.401,122.219 123.391,101.897 124.971,100.317 v1(124.971,98.509) ; 123.321,118.599 128.039,118.59 P1.3@128.061,118.569
+5V: C16.1 C19.2 C20.2 C21.2 C52.1 D6.2 L3.2 P1.1 P1.29 P1.31 P2.2 P3.18 P3.20 pad.1 pad.5 pad.6 pad.8 R11.1 R22.2 R73.1 R74.2 U13.3 U13.8 U13.11 U13.20 U13.23 USB2.1 USB2.5 | length 313.6
  Top Layer w0.25: C19.2@64.032,136.417 64.032,137.037 64.482,137.487 66.374,137.487 66.91,136.951 U13.20@70.986,136.951
  Top Layer w0.28: pad.1@67.494,132.948 67.593,133.057 69.988,135.452 U13.23@70.986,135.452 ; C21.2@79.043,133.397 79.043,133.802 80.432,135.191 R73.1@80.432,136.428 ; R73.1@80.183,136.177 R73.1@80.433,136.427 ; v1(80.183,137.647) 80.183,138.717 R11.1@80.453,138.987
  Top Layer w0.3: U13.3@72.754,134.181 72.754,133.023 v1(73.004,132.773) ; U13.8@74.984,135.437 76.813,135.437 77.303,134.947 77.303,133.887 77.794,133.397 C21.2@79.043,133.397 ; U13.11@74.984,136.935 76.3,136.935 76.834,137.466 76.834,138.838 77.974,139.978 80.133,139.978 80.453,139.656 R11.1@80.453,138.988
  Top Layer w0.6: v1(116.752,80.5) 131.28,80.5 132.329,81.546 132.329,122.308 131.938,122.699 128.697,122.697 P1.1@128.06,121.109 ; 128.061,80.5 P1.31@128.061,83.009
  Top Layer w0.8: R73.1@80.433,136.427 80.593,136.587 80.593,137.637 v1(80.763,137.637) 80.623,137.637 80.623,138.987 R11.1@80.453,138.987
  Top Layer w1: R74.2@63.943,133.397 63.943,134.227 63.983,134.267 63.983,136.367 C19.2@64.033,136.417 ; C52.1@64.471,144.459 64.493,144.481 C16.1@64.493,146.819 ; pad.1@66.551,125.729 66.583,125.729 66.583,128.287 67.202,128.879 C20.2@68.286,128.879 ; D6.2@108.69,169.895 108.771,169.976 pad.5@108.771,171.289
  Top Layer w1.2: L3.2@65.79,149.119 L3.2@66.241,148.668 ; pad.6@66.32,146.819 66.371,146.819 66.371,145.458 67.341,144.487 67.341,137.459 pad.8@67.181,137.299 ; pad.6@66.371,146.819 C16.1@64.493,146.819 64.493,148.751 L3.2@64.861,149.119 67.481,149.119 R22.2@69.901,146.699
  Bottom Layer w0.6: P3.20@111.811,78.029 114.281,78.029 v1(116.752,80.5)
  Bottom Layer w0.8: pad.1@66.551,125.729 66.551,132.005 pad.1@67.493,132.947 ; pad.1@67.494,132.948 67.494,132.777 v1@73.003,132.777 ; v1@73.003,132.772 75.348,132.772 80.184,137.606 v1(80.183,137.647) ; v1(80.183,137.647) 80.763,137.647 v1(80.763,137.637)
  Bottom Layer w1: 66.241,134.807 67.181,135.747 pad.8@67.181,137.299 ; USB2.1@91.09,156.249 USB2.5@91.09,158.85 ; P3.18@109.271,78.029 P3.20@111.811,78.029 ; P1.31@128.061,83.009 P1.29@128.061,85.549
  Bottom Layer w1.2: v1(63.673,134.807) 66.241,134.807 ; P2.2@64.161,121.119 64.161,124.429 65.441,125.709 pad.1@66.531,125.709 ; 66.241,134.031 pad.1@67.494,132.777 ; pad.6@66.32,146.819 81.331,146.819 82.86,148.348 82.86,152.488 84.461,154.089 89.779,154.089 91.09,155.397 USB2.1@91.09,156.249 ; USB2.5@91.09,158.85 91.09,164.767 93.191,166.87 99.741,166.87 104.161,171.29 pad.5@108.771,171.289
  Bottom Layer w1.5: pad.5@108.771,171.289 108.812,171.249 125.151,171.249 129.231,167.17 129.231,156.179 128.133,155.097 128.131,148.539 131.921,144.769 131.921,126.918 128.118,123.116 128.118,121.109 P1.1@128.171,121.109
  other v1: 64.283,134.767
ADC_3.3V: L1.2 U1.33 | length 7.3
  Top Layer w0.254: L1.2@88.72,96.939 88.72,97 90.628,97 93.838,100.218 U1.33@94.641,100.22
B1_1: B1.1 D4.1 | length 9.6
  Top Layer w0.3: v1(75.891,89.709) 81.841,95.659 D4.1@82.991,95.659
C24_2: C24.2 U2.1 | length 12.9
  Top Layer w0.5: C24.2@64.071,156.699 v1(64.981,156.699) ; U2.1@75.261,155.059 v1(75.261,156.719)
  Bottom Layer w0.5: v1(64.981,156.699) 75.241,156.699 v1(75.261,156.719)
C44_2: C44.2 U2.6 | length 3
  Top Layer w0.5: U2.6@72.726,149.277 72.721,148.943 72.721,148.079 73.732,147.068 C44.2@73.732,146.679
C45_1: C45.1 U2.8 | length 5.8
  Top Layer w0.5: U2.8@75.266,149.277 80.902,149.278 C45.1@81.041,149.419
DC_EN: C53.2 D1.2 Q2.3 R3.2 R44.2 U2.7 | length 63.6
  Top Layer w0.35: U2.7@73.996,149.277 73.996,148.444 v1(74.331,148.109) ; v1(83.081,168.029) 94.701,168.029 97.401,165.329 97.401,153.869 98.001,153.269 R3.2@98.241,153.269
  Top Layer w0.4: R3.2@98.241,153.269 98.24,154.719 Q2.3@98.581,155.059 ; R3.2@98.241,153.269 100.191,153.269 R44.2@100.211,153.289 102.161,153.289 C53.2@102.181,153.309 103.671,153.309 103.681,153.319 104.281,153.919 D1.2@104.281,154.31
  Bottom Layer w0.35: v1(74.331,148.109) 77.93,148.11 79.081,149.258 79.152,149.258 79.152,164.099 v1(83.081,168.029)
DCIN: C51.2 D3.2 D7.2 DC1.1 R3.1 U2.2 | length 74.7
  Top Layer w0.35: DC1.1@71.324,159.395 73.447,159.395 74.062,160.009 74.062,165.249 75.301,166.489 95.08,166.489 96.64,164.929 96.64,152.519 97.29,151.869 R3.1@98.241,151.869
  Top Layer w0.5: DC1.1@71.323,159.395 DC1.1@71.337,159.409
  Top Layer w1: DC1.1@70.59,159.029 73.47,159.029 73.991,158.508 U2.2@73.996,155.222
  Top Layer w1.5: D7.2@63.121,159.384 63.476,159.029 DC1.1@70.591,159.029 ; 74.532,160.398 74.532,165.298 75.759,166.489 D3.2@77.222,166.349
  Top Layer w2: DC1.1@71.324,159.395 76.98,159.4 C51.2@77.12,159.54
E3.3V: C28.2 C39.2 L5.2 R14.2 R17.2 R34.1 R35.1 R36.1 R38.2 R40.2 R41.2 R42.2 U5.1 U5.9 U5.19 | length 85.7
  Top Layer w0.254: R34.1@92.661,125.919 92.661,125.533 v1(93.096,125.098) ; R36.1@96.581,125.919 96.581,125.677 v1(97.16,125.098)
  Top Layer w0.28: v1(91.967,137.158) 92.274,136.851 U5.1@92.861,136.851 ; R34.1@92.66,125.918 93.221,125.918 93.62,126.319 93.62,128.29 94.621,129.288 U5.9@94.616,133.708
  Top Layer w0.4: v1(96.711,137.889) 101.151,137.889 101.4,137.64 R14.2@101.4,137.119
  Top Layer w0.5: R35.1@90.401,125.899 v1(91.581,125.899) 92.641,125.899 R34.1@92.661,125.919 ; 96.271,137.729 96.371,137.889 v1(96.711,137.889) ; L5.2@100.161,144.419 102.581,144.419 103.79,145.628 112.06,145.628 112.731,146.298 R17.2@112.731,147.049
  Top Layer w0.6: R17.2@112.743,147.073 R38.2@114.772,147.073 v1(114.772,148.125) ; v1(118.172,148.075) 118.201,148.046 R40.2@118.201,147.073 ; v1(121.472,148.075) 121.63,147.917 R42.2@121.63,147.073 ; v1(124.822,148.075) 125.059,147.838 R41.2@125.059,147.073
  Top Layer w0.8: v1(95.516,141.808) 95.522,144.272 95.668,144.419 L5.2@100.161,144.419 ; 97.894,144.419 97.961,144.352 C39.2@97.961,143.703
  Bottom Layer w0.254: v1(93.096,125.098) 93.096,124.844 93.604,124.336 96.652,124.336 97.16,124.844 v1(97.16,125.098)
  Bottom Layer w0.5: 91.918,125.907 91.512,125.907 91.512,137.038 v1(91.967,137.158) 91.966,137.208 92.646,137.889 v1(96.711,137.889) 95.516,137.889 v1(95.516,141.808)
  Bottom Layer w0.6: v1(114.772,148.125) 114.822,148.075 v1(118.172,148.075) v1(121.472,148.075) v1(124.822,148.075)
FB1: R2.1 R4.2 U13.14 | length 7.5
  Top Layer w0.3: R2.1@72.381,143.219 72.38,141.77 73.742,140.408 U13.14@73.742,138.181
  Top Layer w0.5: R4.2@70.481,143.209 70.491,143.219 R2.1@72.381,143.219
FB2: R7.1 R8.2 U13.5 | length 7.3
  Top Layer w0.28: U13.5@73.753,134.181 73.752,129.128 R7.1@74.001,128.879 R8.2@75.906,128.879
FB3: R5.1 R6.2 U13.2 | length 7.3
  Top Layer w0.28: R5.1@70.191,128.879 72.096,128.879 72.254,129.037 U13.2@72.254,134.181
GND: B1.2 C1.1 C2.1 C3.1 C4.1 C5.1 C6.1 C7.1 C8.1 C9.1 C10.1 C11.1 C12.1 C13.1 C14.1 C15.1 C16.2 C17.1 C18.1 C19.1 C20.1 C21.1 C23.1 C25.1 C26.1 C27.1 C28.1 C29.2 C30.1 C31.2 C32.2 C33.2 C34.2 C35.2 C36.2 C37.2 C38.2 C39.1 C40.2 C41.1 C42.2 C43.1 C45.2 C46.1 C47.1 C48.1 C49.1 C50.1 C51.1 C52.2 C53.1 C57.1 D1.1 D2.1 D3.1 D7.1 DC1.2 DC1.3 DEBUG.b LED4.2 P1.2 P1.4 P1.32 P2.1 P2.7 P2.31 P3.19 Q2.1 R1.1 R4.1 R6.1 R8.1 R10.1 R21.1 R37.1 R44.1 R45.1 R46.1 R47.1 R48.1 R49.1 R51.1 R52.1 R69.1 RJ1.8 RJ1.13 RJ1.14 SW1.1 SW1.2 SW1.3 SW1.4 SW2.1 SW2.2 SW3.1 TF_CARD1.6 TF_CARD1.10 TF_CARD1.11 TF_CARD1.12 TF_CARD1.13 U1.64 U1.95 U1.128 U2.4 U2.9 U3.2 U3.13 U3.23 U3.25 U3.36 U3.48 U4.4 U5.25 U6.4 U9.1 U13.1 U13.4 U13.6 U13.13 U13.18 U13.21 U13.25 UART0.1 USB1.0 USB1.5 USB2.0 USB2.4 USB2.8 X1.2 X1.4 X3.2 X3.4 | length 42.1
  Top Layer w0.24: U1.95@108.44,113.618 108.442,113.619 v1(110.081,113.619) ; v1(118.171,150.286) 118.201,150.256 C38.2@118.201,149.486
  Top Layer w0.25: U13.21@70.986,136.45 71.503,136.45 71.603,136.45 71.872,136.181 U13.25@72.998,136.181
  Top Layer w0.254: R37.1@94.721,125.899 94.721,125.886 v1(95.636,124.971)
  Top Layer w0.28: U13.18@71.743,138.181 71.743,137.604 v1(72.404,136.943) 72.404,136.774 U13.25@72.998,136.18 ; U13.1@71.754,134.181 71.753,134.936 72.382,135.565 U13.25@72.998,136.18 ; U13.4@73.252,134.181 73.252,135.926 U13.25@72.998,136.18 ; U13.13@74.243,138.181 74.242,137.425 U13.25@72.998,136.18 ; U13.6@74.253,134.181 74.253,134.926 U13.25@72.998,136.18 ; X1.4@85.321,135.939 85.529,136.147 C40.2@85.529,137.858 ; C41.1@87.205,132.507 87.205,133.796 X1.2@87.517,134.108 ; C46.1@104.081,122.663 105.765,122.663 105.801,122.699 X3.2@105.801,123.039 ; X3.4@108.001,121.438 108.417,121.855 C49.1@109.681,121.855
  Top Layer w0.3: v1(87.14,81.79) 87.541,81.389 U3.23@91.151,81.389 92.531,81.389 ; v1(91.781,94.869) 91.801,94.889 C47.1@91.801,95.535 91.801,95.298 92.37,94.729 97.232,94.729 97.641,95.138 C48.1@97.641,95.445 ; R48.1@91.965,145.81 91.981,145.825 v1(91.981,147.169) ; v1(93.911,147.139) 93.921,147.129 R49.1@93.921,145.819 ; C48.1@97.641,95.445 97.641,94.829 v1(97.651,94.819)
  other v1: 85.979,76.269 85.979,76.929 85.979,77.588 105.371,80.529 106.061,80.559 106.741,80.559 87.14,82.45 97.691,82.439 98.391,82.439 99.061,82.449 112.621,85.659 112.601,86.389 94.391,87.019 95.051,87.019 95.711,87.019 86.081,88.699 71.131,89.639 71.651,90.199 94.231,90.409 94.961,90.409 95.681,90.409 122.441,91.189 123.171,91.199 109.461,93.609 110.301,93.629 87.101,94.359 87.761,94.359 88.421,94.359 108.6,96.499 109.44,96.519 110.24,96.539 89.961,100.799 90.661,100.799 89.261,100.819 121.731,108.509 84.721,109.479 83.301,109.499 84.021,109.499 114.761,110.719 115.221,111.219 125.211,111.569 115.721,111.659 124.591,112.179 119.161,116.589 120.071,116.579 84.361,117.659 85.021,117.659 85.681,117.659 108.041,120.539 92.351,121.299 92.961,121.309 93.591,121.319 97.001,121.959 105.781,124.059 76.391,125.109 77.051,125.109 89.011,126.109 89.021,127.059 123.291,127.224 76.851,127.519 123.291,128.019 119.951,129.779 69.851,130.459 70.511,130.459 71.171,130.459 101.741,131.669 124.891,131.839 101.051,132.239 89.161,132.339 124.891,132.634 89.141,133.149 124.891,133.429 83.841,134.368 83.841,135.109 94.467,135.158 95.367,135.158 72.404,135.393 73.454,135.393 83.841,135.889 94.467,136.058 95.317,136.058 72.404,136.193 73.454,136.193 112.991,136.379 73.454,136.943 112.991,137.219 111.731,138.409 111.701,139.139 126.87,139.13 127.665,139.13 128.46,139.13 85.481,139.598 85.481,140.339 85.481,141.119 74.491,141.669 75.151,141.669 75.811,141.669 97.461,141.989 98.131,141.989 98.861,141.979 90.091,147.159 113.771,149.469 117.231,149.469 121.631,150.509 112.731,150.649 114.751,150.649 125.031,150.709 121.631,151.209 72.171,151.339 72.974,151.339 73.777,151.339 74.581,151.339 125.031,151.389 125.051,152.089 72.181,152.309 72.984,152.309 73.788,152.309 74.591,152.309 72.141,153.219 72.944,153.219 73.747,153.219 74.551,153.219
GND1: R1.2 U1.32 | length 5.6
  Top Layer w0.254: R1.2@88.721,98.959 90.581,98.959 U1.32@93.241,101.619
L3_1: C24.1 D2.2 L3.1 U2.3 | length 24.1
  Top Layer w0.35: 69.122,155.659 v1(69.991,155.659)
  Top Layer w0.6: v1(77.591,155.159) 78.113,154.636 D2.2@78.201,154.636
  Top Layer w1: C24.1@62.671,156.699 62.671,155.299 63.251,154.719 L3.1@64.861,154.719 ; L3.1@64.861,154.719 68.471,154.719 69.122,155.369 69.122,156.268 69.919,157.068 71.992,157.068 72.726,156.334 U2.3@72.726,155.222
  Bottom Layer w0.6: v1(69.991,155.659) 77.091,155.659 v1(77.591,155.159)
LINK_LED: R45.2 RJ1.12 U5.3 | length 53
  Top Layer w0.28: R45.2@90.06,144.41 90.175,144.296 90.175,136.528 90.852,135.85 U5.3@92.861,135.85 ; R45.2@90.061,144.411 90.572,144.411 90.971,144.808 90.971,148.409 92.21,149.649 108.06,149.649 108.911,150.5 108.911,159.997 110.76,161.846 110.76,166.469 111.344,167.093 RJ1.12@112.406,167.093
LX1: L4.2 U13.12 | length 21.8
  Top Layer w0.28: U13.12@74.748,137.576 74.748,138.716 77.684,141.647 80.191,141.647 L4.2@79.252,141.576 ; U13.12@74.984,137.436 74.984,138.599 77.804,141.416 79.254,141.416 L4.2@79.253,141.577 78.833,141.157 77.893,141.157 75.228,138.492 U13.12@75.228,137.497
LX2: L2.2 U13.7 | length 20.4
  Top Layer w0.3: 74.779,134.771 74.779,133.23 77.187,130.822 L2.2@78.967,130.822 ; U13.7@74.984,134.936 74.984,133.296 77.293,130.987 L2.2@79.173,130.987 ; U13.7@75.2,134.883 75.2,133.43 77.403,131.228 79.386,131.228 L2.2@79.386,130.933
LX3: L7.2 U13.24 | length 29.3
  Top Layer w0.28: L7.2@63.745,131.327 63.745,131.276 68.358,131.276 70.722,133.623 70.722,134.929 U13.24@70.763,134.929 ; L7.2@63.968,131.35 63.968,131.027 68.457,131.027 70.987,133.537 U13.24@70.986,134.952 71.233,134.794 71.233,133.445 68.563,130.796 64.146,130.796 L7.2@64.146,131.193
P2_3: P2.3 R23.2 | length 6.5
  Top Layer w0.3: P2.3@61.621,118.579 61.651,118.579 62.921,119.849 64.72,119.849 66.521,121.648 R23.2@66.881,121.649
P2_4: P2.4 R27.1 | length 3.2
  Top Layer w0.3: P2.4@64.161,118.579 64.372,118.579 65.53,119.738 R27.1@66.871,119.739
P2_5: P2.5 R39.2 | length 6.3
  Top Layer w0.254: P2.5@61.621,116.039 62.901,114.759 65.182,114.759 66.282,115.859 R39.2@66.891,115.859
P2_6: P2.6 R33.1 | length 3.4
  Top Layer w0.3: P2.6@64.161,116.039 64.161,116.069 65.811,117.719 65.881,117.789 R33.1@66.851,117.789
PA0: P2.9 U1.2 | length 33.8
  Top Layer w0.254: P2.9@61.621,110.959 62.86,109.72 67.123,109.72 71.016,113.619 U1.2@93.241,113.619
PA1: P2.12 U1.3 | length 31.8
  Top Layer w0.254: P2.12@63.831,108.209 66.701,108.209 71.692,113.2 U1.3@93.582,113.2
PA2: P2.11 U1.4 | length 34.5
  Top Layer w0.254: P2.11@61.621,108.419 62.853,107.188 66.681,107.188 72.312,112.821 U1.4@93.241,112.821
PA3: P2.14 U1.5 | length 31.8
  Top Layer w0.254: P2.14@64.161,105.879 66.422,105.879 72.962,112.42 U1.5@93.241,112.42
PA4: P2.13 U1.6 | length 35.2
  Top Layer w0.254: P2.13@61.621,105.879 62.883,104.62 66.013,104.62 73.452,112.021 U1.6@93.241,112.021
PA5: P2.16 U1.7 | length 32.5
  Top Layer w0.254: P2.16@64.161,103.339 65.71,103.339 73.988,111.617 U1.7@93.241,111.62
PA6: P2.15 U1.8 | length 35.9
  Top Layer w0.254: P2.15@61.621,103.339 62.901,102.059 65.319,102.059 74.473,111.206 U1.8@93.241,111.221
PA7: P2.18 U1.14 | length 32.4
  Top Layer w0.254: P2.18@64.161,100.799 64.971,100.799 72.993,108.821 U1.14@93.241,108.821
PA8: P2.17 U1.15 | length 35.8
  Top Layer w0.254: P2.17@61.621,100.799 62.911,99.509 64.57,99.509 73.483,108.419 U1.15@93.241,108.419
PA9: P2.20 U1.16 | length 33.2
  Top Layer w0.254: P2.20@64.161,98.259 64.11,98.259 73.871,108.021 U1.16@93.241,108.021